# EAGLE board FPC_8pin1mm (EAGLE 9.5.0)
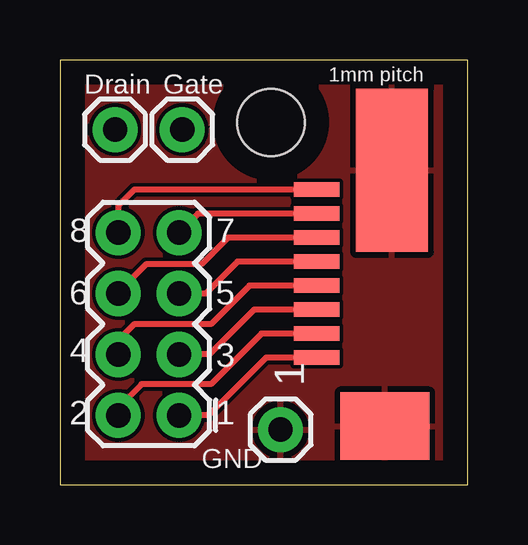
[diagram p0: board, top side]
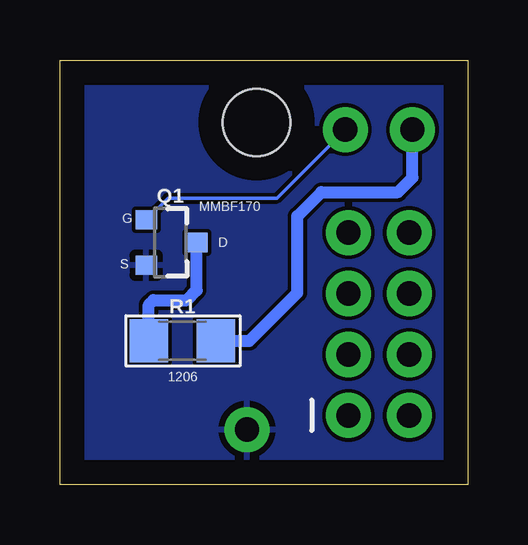
[diagram p1: board, bottom side, seen from below]

Size 17 x 17.7 mm. Coordinates in mm from the lower left corner, seen from the top.
Outline: 0,0 17,0 17,17.7 0,17.7 0,0
Copper layers (1*16): Top 0.035mm / dielectric 1.5mm / Bottom 0.035mm
Design rules "default": minimum track width 6mil, minimum drill 0.35mm, track to track 6mil, track to pad 6mil, pad to pad 6mil, via to via 6mil, smd to smd 6mil, copper to edge 40mil, drill to drill 6mil, minimum pad ring 10mil, minimum via ring 8mil, stop-mask expansion 4mil, vias tented up to drill 0mil, thermal gap 10mil
Holes 2.8 mm at 8.8,15.1

## Footprints (pad centres in the part's own frame; a part is rotated, then mirrored left to right if it is on the bottom)
522710879 = smd 0.6 x 1.9: P$1 -3,2; P$2 -2,2; P$3 -1,2; P$4 0,2; P$5 1,2; P$6 2,2; P$7 3,2; P$8 4,2 | smd 2.8 x 3.7: P$9 -5.85,-0.85 | smd 6.8 x 3: P$10 4.8,-1.15
2X4 = drill 1.016 pad 1.88: 1 -3.81,-1.27; 2 -3.81,1.27; 3 -1.27,-1.27; 4 -1.27,1.27; 5 1.27,-1.27; 6 1.27,1.27; 7 3.81,-1.27; 8 3.81,1.27
1X01 = drill 1.016 pad 1.88: 1 0,0
MMBF170 = smd 0.8 x 0.9: 1 -0.95,-1; 2 0.95,-1; 3 0,1.1
R1206 = smd 1.6 x 1.8: 1 -1.4,0; 2 1.4,0

## Placement (x,y rotation side)
J1  j1  [522710879]  12.7,8.3 90 top
J2  j2  [2X4]  3.7,6.7 90 top
J3  J3  [1X01]  2.3,14.8 0 top
J4  J4  [1X01]  5.1,14.8 0 top
J5  J5  [1X01]  9.2,2.3 0 top
Q1  MMBF170  [MMBF170]  12.4,10.1 270 bottom
R1  1206  [R1206]  11.9,6 0 bottom

## Library data of the parts
J1 = 522710879
J2-J5 = SparkFun-Connectors
Q1 = MMBF170
R1 = R1206

## Nets
GND: J1.P$9 J1.P$10 J5.1 Q1.2
N$1: J1.P$1 J2.1
N$2: J1.P$2 J2.2
N$3: J1.P$3 J2.3
N$4: J1.P$4 J2.4
N$5: J1.P$5 J2.5
N$6: J1.P$6 J2.6
N$7: J1.P$7 J2.7
N$8: J1.P$8 J2.8
N$11: Q1.3 R1.1
N$12: J3.1 R1.2
N$13: J4.1 Q1.1

## Tracks (layer width: path | path; a pad name or v marks a point on that pad's centre or on a via)
GND
  pour Top: 0,0 0,17.7 17,17.7 17,0
  pour Bottom: 0,0 0,17.7 17,17.7 17,0
N$1
  Top 0.254: J1.P$1 8.6,5.3 6.19,2.89 J2.1
N$2
  Top 0.254: J1.P$2 8.4,6.3 6.3,4.2 3.4,4.2 2.43,3.23 J2.2
N$3
  Top 0.254: J1.P$3 8.1,7.3 6.23,5.43 J2.3
N$4
  Top 0.254: J1.P$4 7.9,8.3 6.3,6.7 3.1,6.7 2.43,6.03 J2.4
N$5
  Top 0.254: J1.P$5 7.4,9.3 6.07,7.97 J2.5
N$6
  Top 0.254: J1.P$6 7,10.3 5.9,9.2 3.6,9.2 2.43,8.03 J2.6
N$7
  Top 0.254: J1.P$7 5.76,11.3 J2.7
N$8
  Top 0.254: J1.P$8 3.1,12.3 2.43,11.63 J2.8
N$11
  Bottom 0.508: R1.1 13.3,7.5 13.1,7.7 11.7,7.7 11.3,8.1 Q1.3
N$12
  Bottom 0.508: R1.2 9.1,6 7.1,8 7.1,11.2 6.1,12.2 2.9,12.2 2.3,12.8 J3.1
N$13
  Bottom 0.152: Q1.1 12.5,11.95 7.95,11.95 J4.1

## Text on the board
tPlace: 1mm pitch | Drain | Gate | 8 | 7 | 6 | 5 | 4 | 3 | 2 | 1 | GND
bPlace: MMBF170 | G | D | S | 1206